# Altium PCB ebit_ad.PcbDoc (part 2 of 6)
Units mil, origin at the board's own origin, x right, y up, seen from the top; angles counter-clockwise.
Board outline 3958.82 x 3829.88 mil, 4 copper layers (Top Layer, MidLayer1, MidLayer2, Bottom Layer); 565 components, 392 nets, 1912 pads, 1242 vias.
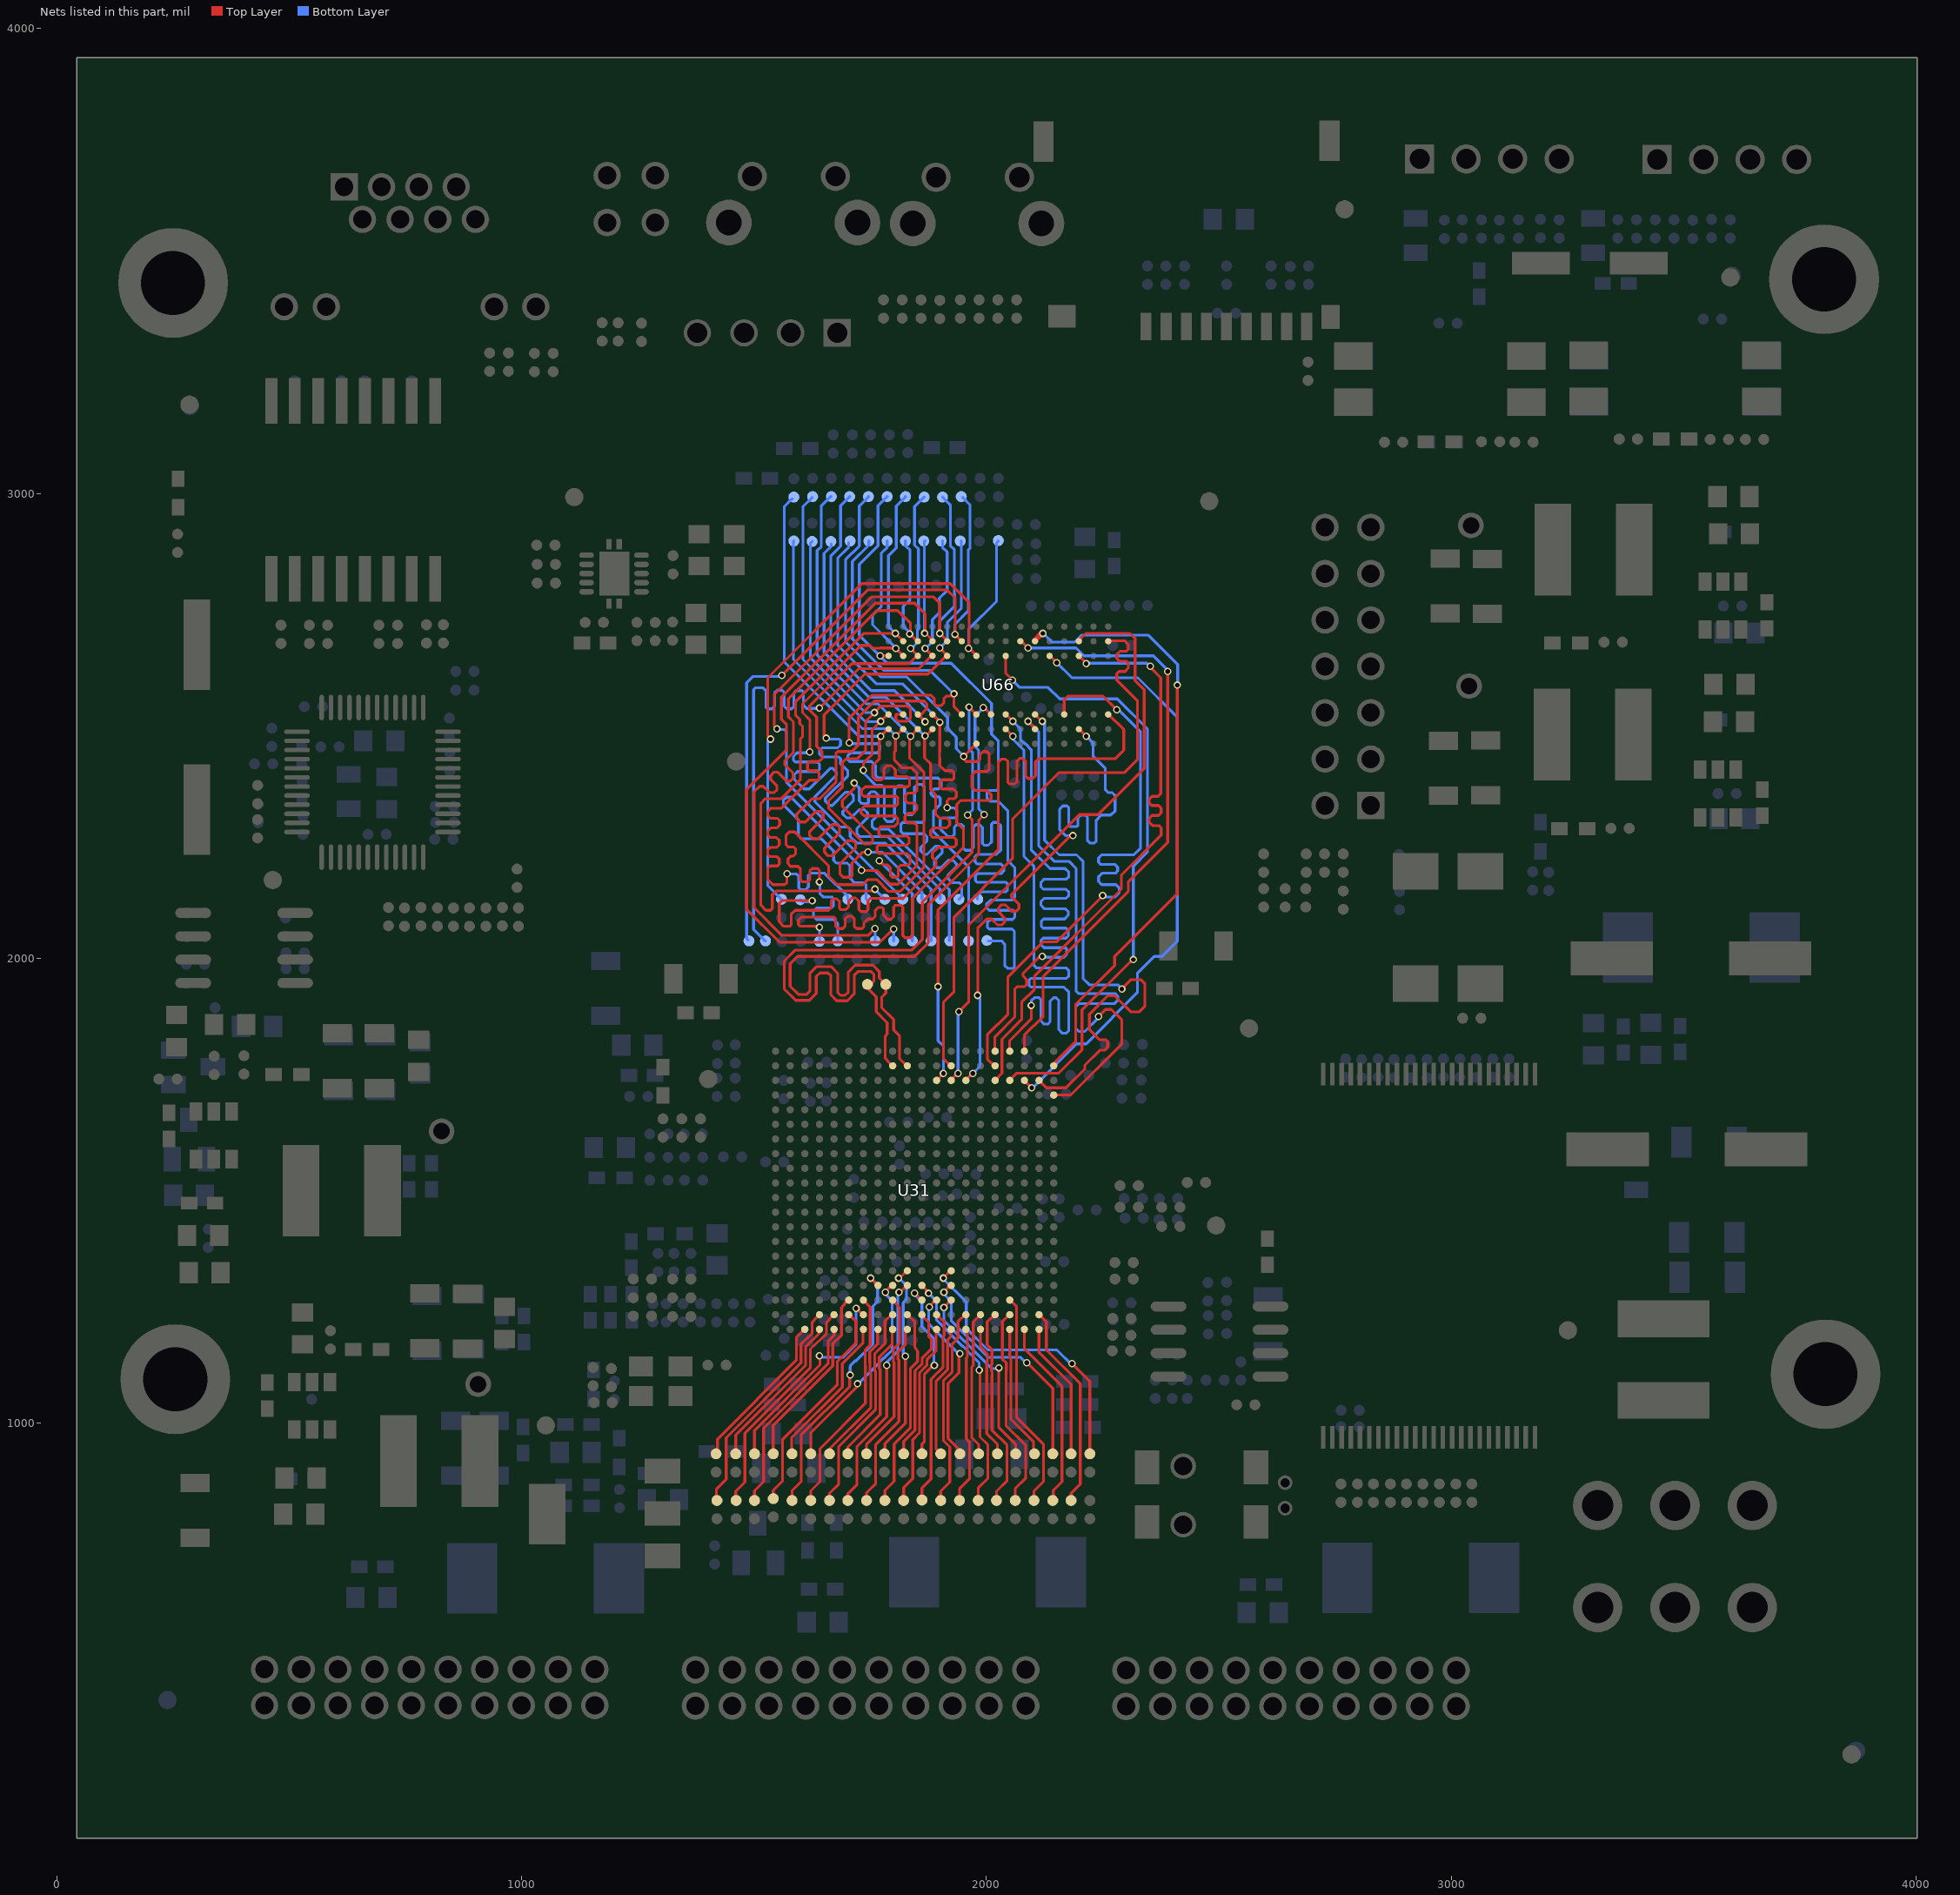
[diagram p4: the nets of this part, all layers, seen from the top]

## Via types
v1: diameter 16, hole 10, Top Layer to Bottom Layer, 1242 vias

## Nets (pads, with @x,y where several pads share a name; then routed paths per layer and width w, separated by ;. In a path a pad name is that pad's centre, name@x,y a point inside that pad or via, vN(x,y) a via of type N, cw(c..) or ccw(c..) an arc to the next point about the centre after c; other vN are vias at no path point) (continued)
DATA1-6_0: R2483.2 U31.H16 | length 618.1
  Top Layer w6: v1(1907.48,1312.01) 1907.48,1312.89 U31.H16@1923.13,1328.53 ; v1(2184.06,1127.95) 2222.44,1089.57 R2483.2@2222.44,934.05
  Bottom Layer w6: v1@1908.46,1309.05 1956.69,1260.83 1956.69,1203.74 2002.95,1157.48 2151.58,1157.48 v1@2184.06,1125
DATA1-7_0: R2478.2 U31.B19 | length 445.5
  Top Layer w6: U31.B19@2113.03,1234.2 2128.94,1218.3 2128.94,1157.48 2201.77,1084.65 2201.77,869.09 2182.09,849.41 R2478.2@2182.09,833.66
DATA1-8_0: R2482.2 U31.B20 | length 297.3
  Top Layer w6: U31.B20@2113.03,1202.76 2113.03,1152.71 2182.09,1083.66 R2482.2@2182.09,934.05
DATA1-9_0: R2477.2 U31.C20 | length 410.4
  Top Layer w6: U31.C20@2081.38,1202.76 2081.38,1160.74 2162.4,1079.72 2162.4,874.02 2143.7,855.31 R2477.2@2143.7,833.66
DATA1-11_0: R2476.2 U31.H17 | length 511
  Top Layer w6: v1(1908.46,1281.5) 1908.46,1282.43 U31.H17@1923.13,1297.09 ; v1(2086.61,1129.92) 2087.6,1129.92 2142.72,1074.8 R2476.2@2142.72,934.05
  Bottom Layer w6: v1(1908.46,1281.5) 1908.46,1277.56 1924.21,1261.81 1924.21,1220.47 2002.95,1141.73 2072.83,1141.73 v1@2087.6,1126.97
DATA1-13_0: R2473A.2 U31.D20 | length 290.3
  Top Layer w6: U31.D20@2051.18,1201.77 2050.2,1200.79 2050.2,1140.75 2052.58,1138.37 2052.58,1108.32 2052.32,1108.07 2052.32,1008.7 2101.38,959.65 2101.38,936.02 R2473A.2@2103.35,934.05
DATA1-14_0: R1488.2 U31.D18 | length 470.9
  Top Layer w6: U31.D18@2049.73,1265.65 2064.96,1250.42 2064.96,1011.81 2123.03,953.74 2123.03,875 2102.36,854.33 R1488.2@2102.36,833.66
DATA1-15_0: R2474.2 U31.H18 | length 410.6
  Top Layer w6: v1(1908.46,1249.02) 1923.13,1263.68 U31.H18@1923.13,1265.65 ; v1(2026.58,1119.09) 2026.58,990.16 2062.99,953.74 R2474.2@2062.99,934.05
  Bottom Layer w6: v1(1908.46,1249.02) 1908.46,1220.47 1953.27,1175.66 1953.78,1175.66 1969.01,1160.43 1969.01,1159.93 2011.81,1117.13 v1@2024.61,1117.13
DATA1-16_0: R1487.2 U31.D19 | length 437.4
  Top Layer w6: U31.D19@2049.73,1234.2 2034.45,1218.92 2034.45,1137.8 2042.58,1129.67 2042.58,1112.47 2042.32,1112.21 2042.32,994.09 2084.65,951.77 2084.65,941.96 2084.54,941.85 2084.54,926.26 2084.65,926.15 2084.65,902.59 2084.54,902.48 2084.54,886.89 2084.65,886.78 2084.65,881.89 2062.01,859.25 R1487.2@2062.01,833.66
DATA1-17_0: R2473.2 U31.F20 | length 283
  Top Layer w6: U31.F20@1987.2,1200.79 1987.2,1163.39 2001.97,1148.62 2001.97,1131.26 2000.58,1129.86 2000.58,977.77 2023.62,954.72 R2473.2@2023.62,934.05
DATA1-18_0: R2480.2 U31.E19 | length 435.9
  Top Layer w6: U31.E19@2018.08,1234.2 2001.72,1217.84 2001.72,1168.56 2011.97,1158.31 2011.97,1127.12 2010.58,1125.72 2010.58,1112.47 2012.22,1110.82 2012.22,1103.4 2011.97,1103.15 2011.97,985.08 2044.29,952.76 2044.29,941.96 2044.18,941.85 2044.18,926.26 2044.29,926.15 2044.29,902.59 2044.18,902.48 2044.18,886.89 2044.29,886.78 2044.29,875.98 2021.65,853.35 R2480.2@2021.65,833.66
DATA1-19_0: R2472.2 U31.F19 | length 311.8
  Top Layer w6: R2472.2@1983.27,934.05 1983.27,954.1 1968.35,969.02 1968.35,1120.85 1971.46,1123.96 1971.46,1217.52 U31.F19@1986.22,1232.28
DATA1-20_0: R2481.2 U31.K17 | length 537.5
  Top Layer w6: U31.K17@1859.82,1297.09 1875.98,1280.93 1875.98,1280.51 1875,1279.53 1875,1278.21 1875.65,1278.21 v1(1875.65,1279.34) ; R2481.2@1982.28,833.66 1982.28,860.24 2002.95,880.91 2002.95,953.74 1986.22,970.47 1986.22,1114.17 1986.17,1114.23 v1(1984.35,1114.23)
  Bottom Layer w6: v1@1875.98,1278.54 1892.72,1261.81 1892.72,1221.46 1948.51,1165.66 1949.64,1165.66 1959.01,1156.29 1959.01,1155.16 1984.25,1129.92 v1@1984.25,1112.2
DATA2-5_0: R2484.2 U31.G20 | length 383.6
  Top Layer w6: R2484.2@1941.93,833.66 1941.93,858.27 1963.58,879.92 1963.58,959.65 1956.69,966.54 1956.69,1140.72 1959.01,1143.03 1959.01,1198.53 U31.G20@1954.78,1202.76
DATA2-6_0: R2493.2 U31.J18 | length 389.6
  Top Layer w6: v1@1876.97,1248.03 1876.97,1251.14 U31.J18@1891.47,1265.65 ; R2493.2@1942.91,934.05 1942.91,941.93 1917.48,967.36 1917.48,1084.8 1940.95,1108.27 1940.95,1149.61 1941,1149.66 v1(1943.01,1149.66)
  Bottom Layer w6: v1@1877.95,1248.03 1875.98,1246.06 1875.98,1213.58 1940.95,1148.62 v1@1940.95,1147.64
  other v1: 1876.97,1250
DATA2-7_0: R2485.2 U31.G19 | length 432.8
  Top Layer w6: R2485.2@1901.58,833.66 1901.58,853.35 1921.26,873.03 1921.26,948.82 1907.48,962.6 1907.48,1091.54 1926.5,1110.55 1926.5,1128.36 1926.34,1128.52 1926.34,1170.43 1938.98,1183.07 1938.98,1218.5 U31.G19@1953.74,1233.27
DATA2-8_0: R2492.2 U31.H20 | length 285
  Top Layer w6: R2492.2@1901.58,934.05 1891.73,943.9 1891.73,1090.55 1916.5,1115.31 1916.5,1124.22 1916.34,1124.38 1916.34,1179.13 1923.23,1186.02 U31.H20@1923.23,1201.77
DATA2-9_0: R2486.2 U31.J19 | length 426
  Top Layer w6: R2486.2@1861.22,834.65 1861.22,860.24 1880.91,879.92 1880.91,1094.49 1894.49,1108.07 ; U31.J19@1891.73,1233.27 1909,1219 1909,1190 1906.34,1183.28 1906.34,1119.89 1894.51,1108.07
DATA2-11_0: R2487A.2 U31.K18 | length 393.4
  Top Layer w6: v1(1845.47,1279.53) 1845.94,1279.53 U31.K18@1859.82,1265.65 ; R2487A.2@1861.22,934.05 1861.22,954.72 1866.14,959.65 1866.14,1104.33 1885.88,1124.07 v1(1887.89,1124.07)
  Bottom Layer w6: v1(1845.47,1279.53) 1845.47,1276.57 1861.22,1260.83 1861.22,1207.68 1886.81,1182.09 1886.81,1126.97 v1@1885.83,1125.98
DATA2-13_0: R2488.2 U31.K19 | length 331.9
  Top Layer w6: R2488.2@1821.85,934.05 1821.85,960.63 1846.14,984.92 1846.14,1112.61 1861.79,1128.26 1861.79,1140.33 1881.73,1160.28 1881.73,1180.28 1875.98,1186.02 1875.98,1216.54 U31.K19@1860.24,1232.28
DATA2-14_0: R2506.2 U31.J20 | length 397.2
  Top Layer w6: R2506.2@1821.85,833.66 1821.85,861.22 1841.54,880.91 1841.54,942.39 1841.54,964.57 1856.14,979.17 1856.14,1108.47 1871.79,1124.12 1871.79,1136.19 1891.89,1156.29 1891.89,1201.61 U31.J20@1891.73,1201.77
DATA2-15_0: R2489.2 U31.L16 | length 430.9
  Top Layer w6: R2489.2@1781.5,934.05 1781.5,955.71 1825.79,1000 1825.79,1141.73 v1@1826.77,1142.72 ; v1(1811.02,1312.01) 1812.99,1312.01 U31.L16@1829.16,1328.17 ; U31.L16@1828.17,1328.17 U31.L16@1828.17,1328.53
  Bottom Layer w6: v1@1812.99,1311.02 1827.76,1296.26 1827.76,1265.75 1820.87,1258.86 1820.87,1148.62 v1(1825.79,1143.7)
DATA2-16_0: R2505.2 U31.L19 | length 441.4
  Top Layer w6: R2505.2@1781.5,833.66 1781.5,855.31 1801.18,875 1801.18,954.72 1836.14,989.68 1836.14,1116.76 1851.79,1132.4 1851.79,1154.47 1846,1163 1846,1218 U31.L19@1827,1236
DATA2-17_0: R2490.2 U31.M18 | length 369.1
  Top Layer w6: R2490.2@1742.13,934.05 1742.13,954.72 1801.43,1014.03 1801.43,1130.64 1799.79,1132.29 1799.79,1158.68 1812.99,1171.88 1812.99,1249.17 U31.M18@1796.52,1265.65
DATA2-18_0: R2507.2 U31.L20 | length 407.6
  Top Layer w6: R2507.2@1742.13,833.66 1742.13,850.39 1748.03,856.3 1748.22,856.3 1761.81,869.89 1761.81,886.78 1761.7,886.89 1761.7,902.48 1761.81,902.59 1761.81,926.15 1761.7,926.26 1761.7,953.63 1811.43,1003.36 1811.43,1135.43 1809.79,1137.07 1809.79,1153.29 1825.79,1169.29 1825.79,1200.79 U31.L20@1828.74,1203.74
DATA2-19_0: R2491.2 U31.M20 | length 308.9
  Top Layer w6: R2491.2@1701.77,934.05 1701.77,948.82 1771.39,1018.44 1771.39,1115.43 1769.43,1117.39 1769.43,1121.12 1769.43,1142.46 1797.24,1170.28 U31.M20@1797.24,1201.77
DATA2-20_0: R2504.2 U31.L17 | length 514.4
  Top Layer w6: R2504.2@1701.77,833.66 1701.77,848.42 1721.46,868.11 1721.46,949.8 1785.43,1013.78 v1(1785.43,1124.02) ; v1@1812.99,1280.51 1828.17,1295.69 U31.L17@1828.17,1297.09
  Bottom Layer w6: v1(1785.43,1124.02) 1785.43,1130.91 1809.06,1154.53 1809.06,1276.57 v1@1812.01,1279.53
  other v1: 1812.01,1281.5
DATA3-5_0: R2496.2 U31.M19 | length 456.3
  Top Layer w6: R2496.2@1662.4,833.66 1662.4,849.41 1682.09,869.09 1682.09,949.8 1761.39,1029.11 1761.39,1111.29 1759.43,1113.25 1759.43,1149.2 1781.5,1171.26 1781.5,1219.49 U31.M19@1795.28,1233.27
DATA3-6_0: R2510.2 U31.N20 | length 311.5
  Top Layer w6: R2510.2@1662.4,934.05 1662.4,944.88 1751.39,1033.87 1751.39,1107.14 1749.43,1109.1 1749.43,1128.87 1749.02,1129.29 1749.02,1153.54 1765.75,1170.28 U31.N20@1765.75,1200.79
DATA3-7_0: R2497.2 U31.P18 | length 490.6
  Top Layer w6: R2497.2@1622.05,833.66 1622.05,854.33 1641.73,874.02 1641.73,944.88 1739.43,1042.58 1739.43,1124.73 1739.02,1125.15 1739.02,1157.69 1750,1168.67 1750,1196.59 1749.99,1208.92 1750,1228.03 1749.99,1240.36 1750,1250 U31.P18@1735.24,1264.76
DATA3-8_0: R2511.2 U31.M17 | length 444.3
  Top Layer w6: R2511.2@1622.05,934.05 1622.05,979.33 1722.44,1079.72 v1(1722.44,1084.65) ; v1@1781.5,1281.5 1781.5,1282.07 U31.M17@1796.52,1297.09
  Bottom Layer w6: v1(1722.44,1084.65) 1724.41,1084.65 1769.43,1129.67 1769.43,1130.64 1778.81,1140.02 1779.78,1140.02 1797.24,1157.48 1797.24,1262.8 v1@1783.46,1276.57
  other v1: 1782.48,1281.5
DATA3-9_0: R2498.2 U31.N17 | length 585.8
  Top Layer w6: R2498.2@1581.69,833.66 1581.69,854.33 1601.38,874.02 1601.38,974.41 1705.71,1078.74 1705.71,1108.27 v1@1706.69,1109.25 ; v1(1750.98,1312.01) 1750.98,1310.97 U31.N17@1764.87,1297.09
  Bottom Layer w6: v1@1706.69,1106.3 1706.69,1121.06 1707.43,1121.8 1707.43,1124.35 1716.81,1133.72 1719.35,1133.72 1755.91,1170.28 1755.91,1251.97 1765.75,1261.81 1765.75,1297.24 v1(1750.98,1312.01)
  other v1: 1706.69,1103.35
DATA3-11_0: R2499.2 U31.P20 | length 333.1
  Top Layer w6: R2499.2@1582.68,934.05 1580.71,936.02 1580.71,968.5 1689.96,1077.76 1689.96,1127.95 1734.25,1172.24 U31.P20@1734.25,1202.76
DATA3-13_0: R2500.2 U31.R18 | length 395.3
  Top Layer w6: R2500.2@1541.34,934.05 1541.34,995.08 1669.45,1123.19 1669.45,1171.42 1688,1189 1688,1248 U31.R18@1700.79,1263.78
DATA3-14_0: R1492.2 U31.R19 | length 476.4
  Top Layer w6: R1492.2@1541.34,837.6 1541.34,855.31 1561.02,875 1561.02,964.57 1679.45,1082.99 1679.45,1133.19 1719,1172 1719,1220 U31.R19@1703.74,1233.27
DATA3-15_0: R2501.2 U31.P19 | length 451.5
  Top Layer w6: R2501.2@1501.97,934.05 1500.98,935.04 1500.98,984.25 1641.73,1125 1641.73,1143.7 v1(1640.75,1144.68) ; v1@1720.47,1247.05 1720.47,1246.95 U31.P19@1733.22,1234.2
  Bottom Layer w6: v1(1640.75,1144.68) 1643.7,1141.73 1691.93,1141.73 1719.49,1169.29 1719.49,1240.16 v1@1718.5,1241.14
  other v1: 1719.49,1247.05
DATA3-16_0: R1491.2 U31.T20 | length 440
  Top Layer w6: R1491.2@1500.98,833.66 1500.98,854.33 1520.67,874.02 1520.67,989.17 1659.45,1127.95 1659.45,1176.18 1672.24,1188.98 U31.T20@1672.24,1202.76
DATA3-17_0: R2502.2 U31.U20 | length 344.3
  Top Layer w6: R2502.2@1460.63,934.05 1460.63,974.41 1611.06,1124.84 1611.06,1164.21 1640.75,1193.9 U31.U20@1640.75,1203.74
DATA3-18_0: R2509.2 U31.T19 | length 485.4
  Top Layer w6: R2509.2@1460.63,835.63 1460.63,853.35 1480.32,873.03 1480.32,978.35 1621.06,1119.09 1621.06,1159.45 1656,1193 1656,1217 1669.91,1231.92 U31.T19@1669.91,1234.2
DATA3-19_0: R2503.2 U31.V20 | length 342.4
  Top Layer w6: R2503.2@1421.26,934.05 1421.26,965.55 1591.06,1135.35 1591.06,1184.57 U31.V20@1606.3,1199.8
DATA3-20_0: R2508.2 U31.U19 | length 491.1
  Top Layer w6: R2508.2@1419.29,833.66 1419.29,858.27 1439.96,878.94 1439.96,968.5 1601.06,1129.61 1601.06,1169.96 1625,1193 1625,1217 1638.26,1231.77 U31.U19@1638.26,1234.2
DDR-A0_0: R2517.2 R2621.1 U66.N3 | length 1428.7
  Top Layer w6: v1(1640.75,2538.39) 1725.39,2623.03 1854.33,2623.03 1883.86,2652.56 1881.89,2652.56 v1(1868.11,2666.34)
  Bottom Layer w6: R2517.2@1524.61,2037.4 1523.62,2037.4 1499.02,2062.01 1499.02,2577.76 1502.95,2581.69 1519.69,2581.69 1525.59,2575.79 1525.59,2540.35 1529.53,2536.42 1538.39,2536.42 1544.29,2542.32 1544.29,2570.87 1550.2,2576.77 1560.04,2576.77 1564.96,2571.85 1564.96,2542.32 1570.87,2536.42 1580.71,2536.42 1585.63,2541.34 1585.63,2570.87 1590.55,2575.79 1603.35,2575.79 1606.3,2572.83 1606.3,2544.29 1613.19,2537.4 v1@1638.78,2537.4 ; v1@1872.05,2669.29 1883.86,2681.1 1883.86,2691.94 1883.61,2692.19 1883.61,2728.09 1898.87,2743.36 1898.87,2762.53 1898.62,2762.78 1898.62,2774.61 1915.35,2791.34 1915.35,2874.02 1905.51,2883.86 R2621.1@1905.51,2897.64
DDR-A1_0: R2518.2 R2622.1 U66.P7 | length 1850.5
  Top Layer w6: v1(1745.08,2228.35) 1734.25,2228.35 1710.63,2204.72 1710.63,2177.17 1707.68,2174.21 1691.93,2174.21 1685.04,2181.1 1685.04,2203.74 1718.5,2237.2 1718.5,2247.05 1712.6,2252.95 1700.79,2252.95 1668.31,2220.47 1659.45,2220.47 1651.58,2228.35 1651.58,2237.2 1684.06,2269.68 1684.06,2281.5 1678.15,2287.4 1668.31,2287.4 1637.8,2256.89 1626.97,2256.89 1619.09,2264.76 1619.09,2271.65 1648.62,2301.18 1648.62,2311.02 1643.7,2315.94 1632.87,2315.94 1610.24,2293.31 1598.43,2293.31 1591.54,2300.2 1591.54,2310.04 1625,2343.5 1641.73,2343.5 1676.18,2377.95 1676.18,2440.94 1680.12,2444.88 1710.63,2444.88 1724.41,2458.66 1724.41,2518.7 1758.86,2553.15 1866.14,2553.15 1872.05,2547.24 1872.05,2537.4 1859.25,2524.61 1852.36,2524.61 v1(1868.11,2508.86)
  Bottom Layer w6: R2622.1@1705.71,2993.11 1686.02,2973.42 1686.02,2886.81 1665.35,2866.14 1665.35,2662.4 1751.97,2575.79 1802.17,2575.79 1868.11,2509.84 v1(1868.11,2508.86) ; v1(1745.08,2228.35) 1775.59,2228.35 1861.22,2142.72 R2518.2@1861.22,2127.95
DDR-A2_0: R2519.2 R2623.1 U66.P3 | length 1537.2
  Top Layer w6: 1567.91,2160.43 1565.95,2158.46 ; v1@1570.87,2183.07 1570.87,2163.39 1565.95,2158.46 ; v1(1836.61,2666.34) 1850.39,2652.56 1852.36,2652.56 1833.66,2633.86 1710.63,2633.86 1619.09,2542.32 1619.09,2534.45 1634.84,2518.7 1634.84,2455.71 1646.65,2443.9 1646.65,2430.12 1639.76,2423.23 1619.09,2423.23 1615.16,2419.29 1615.16,2406.5 1618.11,2403.54 1634.84,2403.54 1639.76,2398.62 1639.76,2385.83 1636.81,2382.87 1619.09,2382.87 1559.06,2322.83 1536.42,2322.83 1529.53,2315.94 1529.53,2307.09 1535.43,2301.18 1550.2,2301.18 1555.12,2296.26 1555.12,2286.42 1549.21,2280.51 1536.42,2280.51 1529.53,2273.62 1529.53,2264.76 1534.45,2259.84 1548.23,2259.84 1554.13,2253.94 1554.13,2244.09 1548.23,2238.19 1534.45,2238.19 1529.53,2233.27 1529.53,2223.42 1534.45,2218.5 1549.21,2218.5 1554.13,2213.58 1554.13,2202.76 1550.2,2198.82 1534.45,2198.82 1529.53,2193.9 1529.53,2169.29 1540.35,2158.46 1565.95,2158.46
  Bottom Layer w6: v1@1575.79,2181.1 1591.54,2181.1 1596.46,2176.18 1596.46,2151.57 1600.39,2147.64 1611.22,2147.64 1617.13,2153.54 1617.13,2178.15 1622.05,2183.07 1651.57,2183.07 1701.77,2132.87 R2519.2@1701.77,2126.97 ; v1@1837.6,2665.35 1851.38,2679.13 1851.38,2692.16 1851.22,2692.32 1851.22,2702.76 1851.22,2705.58 1853.6,2707.96 1853.6,2880.65 1845.47,2888.78 1845.47,2971.46 R2623.1@1866.14,2992.13
  other v1: 1570.87,2182.09
DDR-A3_0: R2520.2 R2624.1 U66.N2 | length 1547.7
  Top Layer w6: v1(1800.2,2062.99) 1799.21,2062.99 1770.67,2034.45 1555.12,2034.45 1484.25,2105.31 1484.25,2363.19 1569.88,2448.82 1569.88,2502.95 1559.06,2513.78 1559.06,2562.01 1760.83,2763.78 1845.47,2763.78 1868.11,2741.14 v1@1868.11,2698.82 ; v1(1867.22,2698.95) 1867.98,2698.95 v1@1868.11,2698.82 ; U66.N2@1883.86,2684.05 1869.1,2698.82 v1@1868.11,2698.82
  Bottom Layer w6: R2520.2@1800.2,2037.4 v1(1800.2,2062.99) ; v1@1868.11,2699.84 v1(1867.22,2698.95) 1866.14,2700.03 1866.14,2895.67 R2624.1@1868.11,2897.64
DDR-A4_0: R2521.2 R2625.1 U66.P8 | length 1798.9
  Top Layer w6: v1(1640.75,2164.37) 1640.75,2188.98 1636.81,2192.91 1625,2192.91 1620.08,2187.99 1620.08,2168.31 1616.14,2164.37 1604.33,2164.37 1599.41,2169.29 1599.41,2192.91 1594.49,2197.83 1578.74,2197.83 1572.83,2203.74 1572.83,2213.58 1578.74,2219.49 1583.66,2219.49 1589.57,2225.39 1589.57,2235.24 1585.63,2239.17 1573.82,2239.17 1568.9,2244.09 1568.9,2264.76 1575.79,2271.65 1587.6,2271.65 1660.43,2198.82 1660.43,2177.17 1679.13,2158.46 1734.25,2158.46 1745.08,2169.29 1763.78,2169.29 1789.37,2143.7 1813.98,2143.7 1865.16,2194.88 1865.16,2400.59 1844.62,2421.13 1843.86,2421.13 1834.48,2430.5 1834.48,2443.75 1834.76,2444.03 1834.76,2475.5 v1(1836.61,2477.36) 1851.38,2492.13 U66.P8@1852.36,2492.13
  Bottom Layer w6: v1@1641.73,2162.4 1641.73,2138.78 1648.62,2131.89 1667.32,2131.89 1670.28,2128.94 1670.28,2112.2 1666.34,2108.27 1634.84,2108.27 1627.95,2101.38 1627.95,2090.55 1634.84,2083.66 1671.26,2083.66 1680.12,2074.8 R2521.2@1680.12,2037.4 ; R2625.1@1666.34,2993.11 1664.37,2993.11 1644.69,2973.42 1644.69,2885.83 1635.83,2876.97 1635.83,2652.56 1741.14,2547.24 1766.73,2547.24 v1@1834.65,2479.33
DDR-A5_0: R2522.2 R2626.1 U66.P2 | length 1530.5
  Top Layer w6: v1(1759.84,2063.98) 1745.08,2049.21 1560.04,2049.21 1500,2109.25 1500,2358.27 1511.81,2370.08 1519.69,2370.08 1533.46,2356.3 1543.31,2356.3 1549.21,2362.2 1549.21,2371.06 1535.43,2384.84 1535.43,2392.72 1543.31,2400.59 1550.2,2400.59 1569.88,2380.91 1577.76,2380.91 1583.66,2386.81 1583.66,2398.62 1565.95,2416.34 1565.95,2424.21 1584.65,2442.91 1584.65,2508.86 1573.82,2519.68 1573.82,2558.07 1763.78,2748.03 1809.06,2748.03 1836.61,2720.47 v1@1836.61,2697.83 ; v1@1835.63,2697.83 1849.41,2684.05 U66.P2@1852.36,2684.05
  Bottom Layer w6: v1(1759.84,2063.98) 1760.83,2062.99 R2522.2@1760.83,2037.4 ; R2626.1@1825.79,2897.64 1825.79,2887.79 1835.63,2877.95 1835.63,2771.65 1820.87,2756.89 1820.87,2736.21 1821.12,2735.96 1821.12,2722.7 1820.87,2722.45 1820.87,2714.57 v1@1835.63,2699.8
  other v1: 1834.65,2697.83
DDR-A6_0: R2523.2 R2627.1 U66.R8 | length 1678.5
  Top Layer w6: v1(1731.3,2188.98) 1763.78,2188.98 1793.31,2159.45 1810.04,2159.45 1850.39,2199.8 1850.39,2285.43 1844.49,2291.34 1830.71,2291.34 1824.8,2297.24 1824.8,2305.12 1831.69,2312.01 1842.52,2312.01 1850.39,2319.88 1850.39,2328.74 1845.47,2333.66 1831.69,2333.66 1825.79,2339.57 1825.79,2350.39 1830.71,2355.31 1845.47,2355.31 1850.39,2360.24 1850.39,2398.62 1839.57,2409.45 1818.9,2409.45 1811.02,2417.32 1802,2426.34 1802,2443.75 1804.13,2445.89 1804.13,2477.36 v1(1805.12,2478.35) 1818.9,2492.13 U66.R8@1820.87,2492.13
  Bottom Layer w6: R2627.1@1585.63,2897.64 1584.65,2896.65 1584.65,2642.72 1733.52,2493.84 1779.27,2493.84 1779.52,2494.09 1789.37,2494.09 v1(1805.12,2478.35) ; v1@1733.27,2186.02 1733.27,2192.91 1579.72,2346.46 1569.88,2346.46 1562.99,2339.57 1562.99,2330.71 1595.47,2298.23 1595.47,2263.78 1602.36,2256.89 1644.69,2256.89 1671.26,2230.31 1671.26,2210.63 1677.17,2204.72 1700.79,2204.72 1706.69,2198.82 1706.69,2172.24 1716.54,2162.4 1736.22,2162.4 1741.14,2157.48 R2523.2@1741.14,2126.97
DDR-A7_0: R2524.2 R2628.1 U66.R2 | length 1426.1
  Top Layer w6: v1(1759.84,2148.62) 1755.91,2144.68 1547.24,2144.68 1539.37,2136.81 1539.37,2107.28 1535.43,2103.35 1525.59,2103.35 1514.76,2114.17 1514.76,2333.66 1524.61,2343.5 1559.06,2343.5 1599.41,2383.86 1599.41,2471.46 1604.33,2476.38 1604.33,2499.02 1598.43,2504.92 1598.43,2513.78 1589.57,2522.64 1589.57,2552.16 1736.47,2699.07 1782.32,2699.07 1782.57,2698.82 v1(1804.13,2698.82) 1818.9,2684.05 U66.R2@1820.87,2684.05
  Bottom Layer w6: v1@1762.8,2145.67 R2524.2@1781.5,2126.97 ; v1@1803.15,2699.8 1789.12,2713.83 1789.12,2865.89 1806.1,2882.87 1806.1,2972.44 1825.79,2992.13 R2628.1@1825.79,2993.11
DDR-A8_0: R2525.2 R2629.1 U66.T8 | length 1904.2
  Top Layer w6: v1@1770.67,2208.66 1778.54,2200.79 1787.4,2200.79 1793.31,2194.88 1793.31,2178.15 1797.24,2174.21 1807.09,2174.21 1810.04,2177.16 1810.04,2194.88 1814.96,2199.8 1831.69,2199.8 1835.63,2203.74 1835.63,2219.49 1829.72,2225.39 1768.7,2225.39 1764.76,2229.33 1764.76,2240.16 1767.72,2243.11 1828.74,2243.11 1833.66,2248.03 1833.66,2258.86 1829.72,2262.79 1773.62,2262.79 1768.7,2267.72 1768.7,2278.54 1773.62,2283.46 1802.17,2283.46 1809.06,2290.35 1809.06,2301.18 1804.13,2306.1 1737.2,2306.1 1735.24,2308.07 1730.32,2312.99 1730.32,2319.88 1738.19,2327.76 1805.12,2327.76 1809.06,2331.69 1809.06,2345.47 1806.1,2348.42 1736.22,2348.42 1731.3,2353.35 1731.3,2361.22 1739.17,2369.09 1830.71,2369.09 1834.65,2373.03 1834.65,2385.83 1829.72,2390.75 1806.1,2390.75 1804.13,2392.72 1804.13,2405.51 1795.28,2414.37 1785.43,2414.37 1779.53,2408.46 1779.53,2388.78 1774.61,2383.86 1761.81,2383.86 1754.92,2390.75 1754.92,2414.37 1769.52,2428.97 1769.52,2472.28 1770.67,2473.42 1770.67,2475.39 v1(1772.64,2477.36) 1787.4,2492.13 U66.T8@1789.37,2492.13
  Bottom Layer w6: R2629.1@1582.68,2988.19 1581.69,2988.19 1564.96,2971.46 1564.96,2637.79 1725.39,2477.36 v1(1772.64,2477.36) ; v1@1771.26,2208.07 1840.55,2138.78 R2525.2@1840.55,2037.4
  other v1: 1769.69,2209.65
DDR-A9_0: R2526.2 R2630.1 U66.R3 | length 1488.5
  Top Layer w6: v1(1620.08,2443.9) 1620.08,2512.79 1604.33,2528.54 1604.33,2547.24 1730.32,2673.23 1749.02,2673.23 1755.17,2667.07 1771.39,2667.07 1771.64,2667.32 1804.13,2667.32 v1(1805.12,2666.34) 1818.9,2652.56 U66.R3@1820.87,2652.56
  Bottom Layer w6: v1@1619.09,2441.93 1592.52,2441.93 1584.65,2434.05 1584.65,2426.18 1588.58,2422.24 1635.83,2422.24 1640.75,2417.32 1640.75,2406.5 1635.83,2401.57 1593.5,2401.57 1586.61,2394.68 1586.61,2384.84 1607.28,2364.17 1619.09,2364.17 1663.39,2408.46 1669.29,2408.46 1677.17,2400.59 1677.17,2393.7 1630.91,2347.44 1630.91,2336.61 1685.04,2282.48 1701.77,2282.48 1706.69,2277.56 1706.69,2261.81 1720.47,2248.03 1781.5,2248.03 1880.91,2148.62 R2526.2@1880.91,2037.4 ; R2630.1@1786.42,2897.64 1786.42,2883.86 1773.62,2871.06 1773.62,2755.91 1754.92,2737.2 1754.92,2717.52 1802.17,2670.28 v1@1802.17,2666.34
DDR-A10_0: R2527.2 R2631.1 U66.L7 | length 1670
  Top Layer w6: v1(1704.72,2463.58) 1704.72,2516.73 1753.94,2565.94 1880.91,2565.94 1887.8,2559.05 1887.8,2548.23 1892.72,2543.31 1902.56,2543.31 1908.46,2549.21 1908.46,2559.05 1913.39,2563.98 1925.2,2563.98 v1(1930.12,2568.9) 1930.12,2541.34 U66.L7@1946.85,2524.61
  Bottom Layer w6: v1@1709.65,2462.6 1710.63,2461.61 1766.73,2461.61 1770.67,2457.68 1770.67,2447.83 1764.76,2441.93 1707.68,2441.93 1701.77,2436.02 1701.77,2427.17 1705.71,2423.23 1752.95,2423.23 1761.81,2414.37 1761.81,2392.72 1766.73,2387.79 1895.67,2387.79 1902.56,2380.91 1902.56,2370.08 1896.65,2364.17 1887.8,2364.17 1880.91,2357.28 1880.91,2353.35 1886.81,2347.44 1897.64,2347.44 1900.59,2344.49 1900.59,2330.71 1885.83,2315.94 1885.83,2272.64 1961.61,2196.85 R2527.2@1961.61,2037.4 ; R2631.1@1747.05,2897.64 1747.05,2888.78 1711.61,2853.35 1711.61,2687.01 1779.53,2619.09 1878.94,2619.09 1927.17,2570.87 v1@1927.17,2569.88
DDR-A11_0: R2528.2 R2632.1 U66.R7 | length 1669.1
  Top Layer w6: v1(1715.55,2376.97) 1715.55,2365.16 1689.96,2339.57 1689.96,2326.77 1754.92,2261.81 1754.92,2250.98 1750,2246.06 1737.2,2246.06 1660.43,2322.83 1660.43,2338.58 1689.96,2368.11 1689.96,2421.26 1697.83,2429.13 1721.46,2429.13 1740.16,2447.83 1740.16,2509.84 v1(1758.86,2528.54) 1772.64,2542.32 1830.71,2542.32 1836.61,2536.42 1836.61,2516.73 1829.72,2509.84 1810.04,2509.84 1805.12,2514.76 1805.12,2523.62 1806.1,2524.61 U66.R7@1820.87,2524.61
  Bottom Layer w6: R2632.1@1625,2896.65 1621.06,2892.72 1621.06,2646.65 1739.17,2528.54 v1@1755.91,2528.54 ; v1(1715.55,2376.97) 1726.38,2366.14 1726.38,2338.58 1732.28,2332.68 1744.09,2332.68 1746.06,2334.65 1746.06,2352.36 1751.97,2358.27 1759.84,2358.27 1766.73,2351.38 1766.73,2308.07 1753.94,2295.28 1753.94,2283.46 1759.84,2277.56 1790.35,2277.56 1920.28,2147.64 R2528.2@1920.28,2038.39
DDR-A12_0: R2529.2 R2633.1 U66.N7 | length 1689.1
  Top Layer w6: U66.N7@1883.86,2524.61 1899.61,2508.86 1899.61,2444.87 1899.35,2444.62 1899.35,2431.36 1899.61,2431.11 1899.61,2414.37 1910.43,2403.54 1926.18,2403.54 1930.12,2399.61 1930.12,2386.81 1927.17,2383.86 1904.53,2383.86 1899.61,2378.94 1899.61,2369.09 1904.53,2364.17 1929.13,2364.17 1935.04,2358.27 1935.04,2347.44 1931.1,2343.5 1920.28,2343.5 1915.35,2338.58 v1(1915.35,2323.82)
  Bottom Layer w6: R2633.1@1703.74,2894.68 1703.74,2884.84 1680.12,2861.22 1680.12,2673.23 1762.8,2590.55 1818.9,2590.55 1899.61,2509.84 v1(1899.61,2507.87) ; v1@1918.31,2323.82 1930.12,2323.82 1936.02,2317.91 1936.02,2305.12 1933.07,2302.17 1904.53,2302.17 1900.59,2298.23 1900.59,2278.54 1917.32,2261.81 1926.18,2261.81 1931.1,2266.73 1931.1,2282.48 1936.02,2287.4 1946.85,2287.4 1950.79,2283.46 1950.79,2236.22 1954.72,2232.28 1965.55,2232.28 1971.46,2238.19 1971.46,2281.5 1977.36,2287.4 1985.24,2287.4 1991.14,2281.5 1991.14,2247.05 1995.08,2243.11 2003.94,2243.11 2010.83,2250 2010.83,2288.39 2014.76,2292.32 2023.62,2292.32 2030.51,2285.43 2030.51,2232.28 2021.65,2223.42 1980.32,2223.42 1975.39,2218.5 1975.39,2207.68 1980.32,2202.76 2031.5,2202.76 2037.4,2196.85 2037.4,2187.99 2031.5,2182.09 1980.32,2182.09 1976.38,2178.15 1976.38,2167.32 1980.32,2163.39 2042.32,2163.39 2045.28,2160.43 2045.28,2146.65 2041.34,2142.72 1988.19,2142.72 1980.32,2134.84 R2529.2@1980.32,2126.97
DDR-A13_0: R2530.2 R2634.1 U66.T3 | length 1639.8
  Top Layer w6: v1@1769.69,2650.59 1787.4,2650.59 U66.T3@1789.37,2652.56
  Bottom Layer w6: R2634.1@1786.42,2993.11 1766.73,2973.42 1766.73,2887.79 1726.38,2847.44 1726.38,2694.88 1786.42,2634.84 1924.21,2634.84 2010.83,2548.23 2010.83,2482.28 2025.59,2467.52 2025.59,2365.16 2021.65,2361.22 2003.94,2361.22 2000.98,2358.27 2000.98,2344.49 2007.87,2337.6 2025.59,2337.6 2046.26,2316.93 2046.26,2209.65 2061.02,2194.88 2061.02,2130.91 2055.12,2125 2008.86,2125 2000,2116.14 2000,2109.25 2005.91,2103.35 2057.09,2103.35 2061.02,2099.41 2061.02,2088.58 2056.1,2083.66 2008.86,2083.66 2001.97,2076.77 2001.97,2066.93 2005.91,2062.99 2055.12,2062.99 2060.04,2058.07 2060.04,1980.31 2058.07,1978.35 2045.28,1978.35 2039.37,1984.25 2039.37,2030.51 2032.48,2037.4 R2530.2@2003.94,2037.4
  other v1: 1771.65,2650.59
DDR-A14_0: R2531.2 R2635.1 U66.T7 | length 1634.4
  Top Layer w6: v1(1735.24,2404.53) 1735.24,2419.29 1753.94,2437.99 1753.94,2491.14 v1(1772.64,2509.84) 1787.4,2524.61 U66.T7@1789.37,2524.61
  Bottom Layer w6: R2635.1@1625,2991.14 1605.32,2971.46 1605.32,2642.72 1739.17,2508.86 1771.65,2508.86 v1(1772.64,2509.84) ; v1@1736.22,2402.56 1736.22,2397.64 1761.81,2372.05 1775.59,2372.05 1780.51,2367.13 1780.51,2300.2 1786.42,2294.29 1797.24,2294.29 1802.17,2299.21 1802.17,2363.19 1810.04,2371.06 1818.9,2371.06 1823.82,2366.14 1823.82,2312.99 1827.76,2309.05 1839.57,2309.05 1845.47,2314.96 1845.47,2368.11 1851.38,2374.02 1861.22,2374.02 1866.14,2369.09 1866.14,2296.26 1862.2,2292.32 1819.88,2292.32 1815.95,2288.39 1815.95,2272.64 1820.87,2267.72 1866.14,2267.72 1872.05,2261.81 1872.05,2251.97 1858.27,2238.19 1858.27,2231.3 1866.14,2223.42 1872.05,2223.42 1889.76,2241.14 1898.62,2241.14 1904.53,2235.24 1904.53,2226.38 1887.8,2209.65 1887.8,2199.8 1892.72,2194.88 1902.56,2194.88 1918.31,2210.63 1928.15,2210.63 1936.02,2202.76 1936.02,2197.83 1917.32,2179.13 1917.32,2171.26 1926.18,2162.4 1941.93,2162.4 1946.85,2157.48 1946.85,2132.87 R2531.2@1940.95,2126.97
DDR-BA0_0: R2514.2 R2636.1 U66.M2 | length 1418
  Top Layer w6: v1(1549.21,2493.11) 1543.31,2499.02 1543.31,2566.93 1753.94,2777.56 1885.83,2777.56 1899.61,2763.78 v1(1899.61,2698.82) 1914.37,2684.05 U66.M2@1915.36,2684.05
  Bottom Layer w6: v1@1547.24,2492.13 1564.96,2492.13 1569.88,2487.2 1569.88,2377.95 1819.88,2127.95 R2514.2@1819.88,2126.97 ; v1(1899.61,2698.82) 1899.61,2725.39 1931.35,2757.14 1931.35,2783.35 1931.1,2783.6 1931.1,2878.94 1922.24,2887.79 1922.24,2975.39 R2636.1@1905.51,2992.13
DDR-BA1_0: R2515.2 R2637.1 U66.N8 | length 1625.7
  Top Layer w6: v1(1625,2124.02) 1560.04,2124.02 1554.13,2118.11 1554.13,2078.74 1563.98,2068.9 1576.77,2068.9 1579.72,2071.85 1579.72,2094.49 1588.58,2103.35 1660.43,2103.35 1666.34,2109.25 1666.34,2124.02 1670.28,2127.95 1678.15,2127.95 1684.06,2122.05 1684.06,2107.28 1687.01,2104.33 1696.85,2104.33 1703.74,2111.22 1703.74,2123.03 1710.63,2129.92 1718.5,2129.92 1725.39,2123.03 1725.39,2105.31 1730.32,2100.39 1741.14,2100.39 1745.08,2104.33 1745.08,2124.02 1750,2128.94 1820.87,2128.94 1891.73,2199.8 1891.73,2208.66 1883.86,2216.54 1883.86,2226.38 1896.65,2239.17 1930.12,2239.17 1935.04,2244.09 1935.04,2254.92 1930.12,2259.84 1884.84,2259.84 1879.92,2264.76 1879.92,2274.61 1885.83,2280.51 1914.37,2280.51 1921.26,2287.4 1921.26,2295.28 1915.35,2301.18 1899.61,2301.18 1890.75,2310.04 1890.75,2352.36 1879.92,2363.19 1879.92,2418.31 1866.97,2431.26 1866.97,2446.97 1866.97,2477.2 v1(1868.11,2478.35) 1870.08,2478.35 U66.N8@1883.86,2492.13
  Bottom Layer w6: R2515.2@1599.41,2125.98 1603.35,2122.05 v1@1620.08,2122.05 ; R2637.1@1666.34,2891.73 1666.34,2886.81 1650.59,2871.06 1650.59,2658.46 1748.03,2561.02 1784.45,2561.02 1867.13,2478.35 v1(1868.11,2478.35)
DDR-BA2_0: R2516.2 R2638.1 U66.M3 | length 1403.3
  Top Layer w6: v1(1655.51,2473.42) 1650.59,2478.35 1650.59,2523.62 1738.19,2611.22 1874.02,2611.22 1915.36,2652.56 1914.37,2652.56 v1(1899.61,2667.32)
  Bottom Layer w6: v1@1659.45,2471.46 1683.07,2471.46 1686.02,2468.5 1686.02,2458.66 1680.12,2452.76 1646.65,2452.76 1640.75,2446.85 1640.75,2438.98 1646.65,2433.07 1682.09,2433.07 1686.02,2429.13 1686.02,2418.31 1701.77,2402.56 1701.77,2392.72 1653.54,2344.49 1653.54,2337.6 1662.4,2328.74 1668.31,2328.74 1696.85,2357.28 1706.69,2357.28 1713.58,2350.39 1713.58,2338.58 1690.95,2315.94 1690.95,2310.04 1698.82,2302.17 1708.66,2302.17 1726.38,2319.88 1737.2,2319.88 1744.09,2312.99 1744.09,2302.16 1721.46,2279.53 1721.46,2267.72 1727.36,2261.81 1787.4,2261.81 1900.59,2148.62 R2516.2@1900.59,2127.95 ; v1(1899.61,2667.32) 1916.09,2683.8 1916.09,2723.17 1945.87,2752.95 R2638.1@1945.87,2897.64
DDR-CAS_0: R2533.2 R2640.1 U66.K3 | length 1402.2
  Top Layer w6: v1(1535.43,2471.46) 1529.53,2477.36 1529.53,2603.35 1732.28,2806.1 1922.24,2806.1 1962.6,2765.75 1962.6,2667.32 1977.36,2652.56 U66.K3@1978.35,2652.56
  Bottom Layer w6: v1@1532.48,2469.49 1529.53,2466.54 1529.53,2156.5 R2533.2@1559.06,2126.97 ; v1(1961.61,2666.34) 1961.61,2707.68 2021.65,2767.72 2021.65,2893.7 R2640.1@2025.59,2897.64
DDR-CK#_0: R2542.1 U31.M2 U66.K7 | length 1532.1
  Top Layer w6: R2542.1@1744.09,1943.9 1750.98,1943.9 1757.87,1950.79 1757.87,1965.55 1751.97,1971.46 1723.43,1971.46 1715.55,1963.58 1715.55,1923.23 1700.79,1908.46 1678.15,1908.46 1665.35,1921.26 1665.35,1962.6 1659.45,1968.5 1641.73,1968.5 1633.86,1960.63 1633.86,1924.21 1619.09,1909.45 1589.57,1909.45 1564.96,1934.05 1564.96,1994.09 1588.58,2017.72 1839.57,2017.72 1862.2,2040.35 1862.2,2121.06 1969.49,2228.35 1969.49,2298.23 v1(1959.65,2308.07) ; R2542.1@1747.05,1939.96 1747.05,1933.07 1762.8,1917.32 1762.8,1884.84 1786.42,1861.22 1786.42,1837.6 1782,1831 1782,1786 U31.M2@1796.52,1768.75 ; v1@1961.61,2540.35 v1(1962.6,2540.35) U66.K7@1978.35,2524.61
  Bottom Layer w6: v1@1958.66,2308.07 1970.47,2319.88 1970.47,2441.93 1962.6,2449.8 v1(1962.6,2540.35)
DDR-CK_0: R2542.2 U31.L2 U66.J7 | length 1544.6
  Top Layer w6: R2542.2@1783.46,1941.93 1783.46,1925.2 1774.61,1916.34 1774.61,1893.7 1800.2,1868.11 1800.2,1845.47 1813.24,1832.42 1813.24,1815.22 1812.99,1814.97 1812.99,1783.93 U31.L2@1828.17,1768.75 ; R2542.2@1783.46,1943.9 1769.69,1957.68 1769.69,1971.46 1755.91,1985.24 1717.52,1985.24 1702.76,1970.47 1702.76,1927.17 1695.87,1920.28 1686.02,1920.28 1680.12,1926.18 1680.12,1967.52 1665.35,1982.28 1634.84,1982.28 1620.08,1967.52 1620.08,1929.13 1613.19,1922.24 1595.47,1922.24 1577.76,1939.96 1577.76,1988.19 1593.5,2003.94 1845.47,2003.94 1875,2033.46 1875,2115.16 1983.27,2223.42 1983.27,2297.24 v1(1995.08,2309.05) ; v1@1994.09,2541.34 1994.09,2540.35 U66.J7@2009.84,2524.61
  Bottom Layer w6: v1@1993.11,2538.39 1975.39,2520.67 1975.39,2455.71 1983.27,2447.83 1983.27,2320.87 v1(1995.08,2309.05)
  other v1: 1993.11,2539.37
DDR-CKE_0: R2536.2 R2644.1 U66.K9 | length 1935.1
  Top Layer w6: v1@1640.75,2068.9 1599.41,2068.9 1595.47,2072.83 1595.47,2081.69 1602.36,2088.58 1672.24,2088.58 1675.2,2085.63 1675.2,2069.88 1681.1,2063.98 1690.95,2063.98 1695.87,2068.9 1695.87,2084.65 1701.77,2090.55 1710.63,2090.55 1715.55,2085.63 1715.55,2068.9 1720.47,2063.98 1732.28,2063.98 1736.22,2067.91 1736.22,2075.79 1745.08,2084.65 1754.92,2084.65 1760.83,2090.55 1760.83,2103.35 1766.73,2109.25 1775.59,2109.25 1778.54,2106.3 1778.54,2092.52 1787.4,2083.66 1794.29,2083.66 1800.2,2089.57 1800.2,2110.24 1804.13,2114.17 1815.95,2114.17 1819.88,2110.24 1819.88,2049.21 1824.8,2044.29 1835.63,2044.29 1840.55,2049.21 1840.55,2128.94 1950.79,2239.17 1950.79,2277.56 1936.02,2292.32 1936.02,2330.71 1944.88,2339.57 2005.91,2339.57 2009.84,2343.5 2009.84,2352.36 2000.98,2361.22 1975.39,2361.22 1968.5,2368.11 1968.5,2393.7 1976.38,2401.57 2000.98,2401.57 2005.91,2406.5 2005.91,2439.96 2000.98,2444.88 1993.11,2444.88 1986.22,2437.99 1986.22,2428.15 1981.3,2423.23 1956.69,2423.23 1950.79,2429.13 v1(1950.79,2434.05) U66.K9@1978.35,2461.61
  Bottom Layer w6: R2536.2@1640.75,2036.42 v1@1640.75,2064.96 ; R2644.1@1746.06,2993.11 1746.06,2992.13 1726.38,2972.44 1726.38,2886.81 1696.85,2857.28 1696.85,2681.1 1772.64,2605.31 1828.74,2605.31 1916.34,2517.72 1916.34,2494.09 1935.04,2475.39 1935.04,2450.79 v1@1947.83,2437.99
  other v1: 1640.75,2066.93
DDR-CS_0: R2535.2 R2643.1 U66.L2 | length 1507.5
  Top Layer w6: v1(1560.04,2608.27) 1744.09,2792.32 1915.35,2792.32 1933.07,2774.61 1933.07,2719.45 1932.96,2719.34 1932.96,2707.83 1933.07,2707.72 1933.07,2701.77 1930.12,2698.82 v1(1932.09,2696.85) 1944.88,2684.05 U66.L2@1946.85,2684.05
  Bottom Layer w6: R2535.2@1487.2,2039.37 1484.25,2042.32 1484.25,2592.52 1498.03,2606.3 1558.07,2606.3 v1(1560.04,2608.27) ; v1(1932.09,2696.85) 1932.09,2718.5 1960.63,2747.05 1960.63,2877.95 1964.57,2881.89 1964.57,2975.39 R2643.1@1948.82,2991.14
DDR-DQ0_0: U31.C3 U66.E3 | length 1299.4
  Top Layer w6: U31.C3@2081.38,1737.31 2097.23,1721.46 v1(2097.44,1721.46) ; U66.E3@2135.83,2652.56 2135.83,2651.57 v1(2151.58,2635.83)
  Bottom Layer w6: v1@2100.39,1723.42 2101.38,1723.42 2193.9,1815.94 2214.57,1815.94 2324.8,1926.18 2324.8,1967.52 2361.22,2003.94 2377.95,2003.94 2410.43,2036.42 2410.43,2518.7 2325.79,2603.35 2184.06,2603.35 v1(2151.58,2635.83)
DDR-DQ1_0: U31.B3 U66.F7 | length 1281.7
  Top Layer w6: U66.F7@2104.33,2524.61 2119.09,2509.84 v1(2120.08,2509.84) ; U31.B3@2113.03,1737.31 2128.89,1721.46 2171.26,1721.46 2211.61,1761.81 2211.61,1769.68 2244.09,1802.17 2253.94,1802.17 2260.83,1809.05 2260.83,1820.87 2256.89,1824.8 2243.11,1824.8 2221.46,1846.46 2221.46,1879.92 2260.83,1919.29 2275.59,1919.29 2310.04,1884.84 2328.74,1884.84 2340.55,1896.65 2340.55,1945.87 2332.68,1953.74 2310.04,1953.74 2291.34,1935.04 v1(2291.34,1934.05)
  Bottom Layer w6: v1(2120.08,2509.84) 2125,2504.92 2125,2253.94 2156.5,2222.44 2193.9,2222.44 2207.68,2208.66 2207.68,1956.69 2221.46,1942.91 2282.48,1942.91 v1(2291.34,1934.05)
DDR-DQ2_0: U31.A2 U66.F2 | length 1323.2
  Top Layer w6: U31.A2@2144.69,1768.75 2144.69,1773.62 2191.93,1820.87 2191.93,1900.59 2275.59,1984.25 2275.59,2003.94 2410.43,2138.78 v1(2410.43,2587.6) v1@2409.45,2588.58
  Top Layer w12: U66.F2@2104.33,2684.06 v1@2120.08,2699.8
  Bottom Layer w6: v1@2122.05,2698.82 2140.75,2680.12 2189.96,2680.12 2204.72,2694.88 2348.43,2694.88 2411.42,2631.89 v1@2411.42,2590.55
  other v1: 2121.06,2698.82
DDR-DQ3_0: U31.A4 U66.F8 | length 1283.4
  Top Layer w6: v1(2089.57,2509.84) 2104.33,2495.08 U66.F8@2104.33,2492.13 ; U31.A4@2144.69,1705.86 2181.26,1705.86 2291.34,1815.94 2291.34,1867.13 2268.7,1889.76 2255.91,1889.76 v1(2241.14,1875)
  Bottom Layer w6: v1@2092.52,2506.89 2112.2,2487.2 2112.2,2242.13 2145.67,2208.66 2177.17,2208.66 2192.91,2192.91 2192.91,1929.13 2197.83,1924.21 2276.58,1924.21 2282.48,1918.31 2282.48,1909.45 2275.59,1902.56 2198.82,1902.56 2191.93,1895.67 2191.93,1849.41 2198.82,1842.52 2211.61,1842.52 2241.14,1872.05 v1(2241.14,1875)
DDR-DQ4_0: U31.D3 U66.H3 | length 1328.7
  Top Layer w6: U66.H3@2041.34,2652.56 2041.34,2613.19 v1(2056.1,2598.42) ; U31.D3@2049.73,1737.31 2065.38,1752.95 2155.51,1752.95 2205.71,1803.15 2205.71,1888.78 2313.98,1997.05 v1(2315.95,1997.05)
  Bottom Layer w6: v1(2056.1,2598.42) 2071.85,2582.68 2132.87,2582.68 2157.48,2558.07 2281.5,2558.07 2346.46,2493.11 2346.46,2228.35 2315.95,2197.83 2315.95,1998.03 v1@2317.91,1996.06
DDR-DQ5_0: U31.D1 U66.H8 | length 1283.6
  Top Layer w6: U66.H8@2041.34,2492.13 2042.32,2492.13 v1(2057.09,2477.36) ; U31.D1@2049.73,1800.2 2049.73,1822.37 2096.46,1869.09 v1(2096.46,1898.62)
  Bottom Layer w6: v1@2058.07,2479.33 2058.07,2470.47 2080.71,2447.83 2080.71,2219.49 2102.36,2197.83 2102.36,1984.25 2107.28,1979.33 2171.26,1979.33 2177.17,1973.42 2177.17,1961.61 2172.24,1956.69 2095.47,1956.69 2091.54,1952.76 2091.54,1941.93 2095.47,1937.99 2166.34,1937.99 2177.17,1927.16 2177.17,1844.49 2171.26,1838.58 2163.39,1838.58 2155.51,1846.46 2155.51,1909.45 2149.61,1915.35 2144.69,1915.35 2136.81,1907.48 2136.81,1863.19 2131.89,1858.27 2124.02,1858.27 2117.13,1865.16 2117.13,1911.42 2113.19,1915.35 2103.35,1915.35 2096.46,1908.46 v1(2096.46,1898.62)
DDR-DQ6_0: U31.C1 U66.G2 | length 1293.7
  Top Layer w6: U66.G2@2072.84,2684.05 v1(2089.57,2667.32) ; U31.C1@2081.38,1800.2 2081.38,1834.33 2122.05,1875 2122.05,1960.63 2305.12,2143.7 2305.12,2164.37 2389.76,2249.02 v1(2389.76,2617.13)
  Bottom Layer w6: v1(2089.57,2667.32) 2192.91,2667.32 2209.65,2650.59 2359.25,2650.59 v1@2393.7,2616.14
DDR-DQ7_0: U31.E1 U66.H7 | length 1330.2
  Top Layer w6: U31.E1@2018.08,1800.2 2018.08,1831.07 2061.02,1874.02 2061.02,1934.05 2065.95,1938.98 2081.69,1938.98 2086.61,1943.9 2086.61,1953.74 2078.74,1961.61 2078.74,1967.52 2115.16,2003.94 v1(2120.08,2003.94) ; U66.H7@2041.34,2524.61 2042.32,2524.61 v1(2057.09,2509.84)
  Bottom Layer w6: v1(2057.09,2509.84) 2073.09,2493.84 2073.09,2471.21 2082.94,2461.36 2083.91,2461.36 2096.46,2448.82 2096.46,2233.27 2136.81,2192.91 2169.29,2192.91 2177.17,2185.04 2177.17,2175.2 2172.24,2170.28 2124.02,2170.28 2117.13,2163.39 2117.13,2153.54 2122.05,2148.62 2171.26,2148.62 2177.17,2142.72 2177.17,2134.84 2171.26,2128.94 2124.02,2128.94 2117.13,2122.05 2117.13,2114.17 2125,2106.3 2170.28,2106.3 2176.18,2100.39 2176.18,2092.52 2168.31,2084.65 2123.03,2084.65 2118.11,2079.72 2118.11,2068.9 2122.05,2064.96 2171.26,2064.96 2176.18,2060.04 2176.18,2048.23 2171.26,2043.31 2122.05,2043.31 2117.13,2038.39 2117.13,2029.53 2124.02,2022.64 2170.28,2022.64 2172.24,2020.67 2172.24,2007.87 2166.34,2001.97 2122.05,2001.97 v1(2120.08,2003.94)
DDR-DQ8_0: U31.E2 U66.D7 | length 1288.5
  Top Layer w6: U31.E2@2018.08,1768.75 2016.68,1768.75 2001.97,1783.46 2001.97,1835.63 2046.26,1879.92 2046.26,1959.65 2122.05,2035.43 2151.58,2035.43 2250,2133.86 v1(2250,2134.84) ; U66.D7@2167.32,2524.61 2167.32,2556.1 2175.2,2563.98 2250.98,2563.98 v1(2280.51,2534.45)
  Bottom Layer w6: v1(2250,2134.84) 2252.95,2131.89 2276.58,2131.89 2285.43,2140.75 2285.43,2151.57 2278.54,2158.46 2248.03,2158.46 2241.14,2165.35 2241.14,2175.2 2249.02,2183.07 2277.56,2183.07 2282.48,2187.99 2282.48,2195.87 2276.57,2201.77 2246.06,2201.77 2241.14,2206.69 2241.14,2215.55 2248.03,2222.44 2316.93,2222.44 2331.69,2237.2 2331.69,2487.2 2286.42,2532.48 v1@2285.43,2532.48
DDR-DQ9_0: U31.E3 U66.C3 | length 1288.3
  Top Layer w6: U31.E3@2018.08,1737.31 2033.46,1752.69 2033.46,1825.79 2075.79,1868.11 2075.79,1905.51 2103.35,1933.07 2103.35,1961.61 2290.35,2148.62 2290.35,2179.13 2375.98,2264.76 2375.98,2280.51 2371.06,2285.43 2357.28,2285.43 2350.39,2292.32 2350.39,2301.18 2356.3,2307.09 2370.08,2307.09 2375.98,2312.99 2375.98,2322.83 2370.08,2328.74 2355.32,2328.74 2350.39,2333.66 2350.39,2342.52 2356.3,2348.42 2369.09,2348.42 2375,2354.33 2375,2603.35 v1@2350.39,2627.95 ; U66.C3@2198.82,2652.56 2198.82,2650.59 v1@2214.57,2634.84
  Bottom Layer w6: v1@2214.57,2634.84 2345.47,2634.84 v1(2352.36,2627.95)
  other v1: 2214.57,2633.86
DDR-DQ10_0: U31.G3 U66.C8 | length 1305.6
  Top Layer w6: U31.G3@1954.78,1737.31 1969.44,1751.97 v1(1970.47,1751.97) ; v1@1982.28,1920.28 v1(1981.3,1920.28) 1981.3,2064.96 2000.98,2084.65 2010.83,2084.65 2023.62,2071.85 2033.46,2071.85 2039.37,2077.76 2039.37,2086.61 2025.59,2100.39 2025.59,2108.27 2032.48,2115.16 2040.35,2115.16 2054.13,2101.38 2063.98,2101.38 2069.88,2107.28 2069.88,2116.14 2054.13,2131.89 2054.13,2136.81 2181.1,2263.78 v1(2186.02,2263.78) ; U66.C8@2198.82,2492.13 2199.8,2492.13 v1(2214.57,2477.36)
  Bottom Layer w6: v1(1970.47,1751.97) 1986.22,1767.72 1986.22,1913.39 v1@1983.27,1916.34 ; v1@2182.09,2263.78 2170.28,2263.78 2157.48,2276.57 2157.48,2320.87 2164.37,2327.76 2173.23,2327.76 2177.17,2323.82 2177.17,2285.43 2179.13,2283.46 2194.88,2283.46 2196.85,2285.43 2196.85,2302.17 2202.76,2308.07 2212.6,2308.07 2217.52,2303.15 2217.52,2252.95 2222.44,2248.03 2232.28,2248.03 2236.22,2251.97 2236.22,2297.24 2247.05,2308.07 2267.72,2308.07 2276.58,2316.93 2276.58,2350.39 2270.67,2356.3 2261.81,2356.3 2255.91,2362.2 2255.91,2408.46 2229.33,2435.04 2229.33,2463.58 2215.55,2477.36 v1(2214.57,2477.36)
DDR-DQ11_0: U31.H3 U66.C2 | length 1290.7
  Top Layer w6: U31.H3@1923.13,1737.31 1923.33,1737.31 v1@1937.99,1751.97 ; v1@1939.96,1883.86 v1(1940.95,1884.84) 1961.61,1905.51 1961.61,2070.87 2199.8,2309.05 2240.16,2309.05 2339.57,2408.46 2339.57,2577.76 2319.88,2597.44 2319.88,2687.99 2309.06,2698.82 2213.58,2698.82 U66.C2@2198.82,2684.05
  Bottom Layer w6: v1@1937.01,1750 v1(1938.98,1751.97) 1938.98,1814.97 1938.72,1815.22 1938.72,1882.62 v1(1940.95,1884.84)
DDR-DQ12_0: U31.J3 U66.A7 | length 1286.7
  Top Layer w6: U31.J3@1891.47,1737.31 1892.82,1737.31 v1(1907.48,1751.97) ; v1(1895.67,1938.98) 1895.67,2104.33 2025.59,2234.25 2025.59,2422.24 2031.5,2428.15 2041.34,2428.15 2046.26,2423.23 2046.26,2377.95 2049.21,2375 2061.02,2375 2065.95,2379.92 2065.95,2424.21 2071.85,2430.12 2077.76,2430.12 2084.65,2423.23 2084.65,2391.73 2089.57,2386.81 2099.41,2386.81 2105.32,2392.72 2105.32,2422.24 2112.2,2429.13 2276.58,2429.13 2295.28,2447.83 2295.28,2492.13 2262.8,2524.61 U66.A7@2261.81,2524.61
  Bottom Layer w6: v1@1895.67,1935.04 1895.67,1822.83 1907.48,1811.02 v1(1907.48,1751.97)
DDR-DQ13_0: U31.H2 U66.A2 | length 1285
  Top Layer w6: U31.H2@1923.13,1768.75 1907.48,1784.4 1907.48,1905.51 1930.12,1928.15 1930.12,2088.58 2056.1,2214.57 2056.1,2299.21 2156.5,2399.61 2297.24,2399.61 2324.8,2427.17 2324.8,2554.13 2280.51,2598.42 2280.51,2612.2 2285.43,2617.13 2298.23,2617.13 2305.12,2624.02 2305.12,2634.84 2301.18,2638.78 2286.42,2638.78 2280.51,2644.68 2280.51,2653.54 2287.4,2660.43 2301.18,2660.43 2305.12,2664.37 2305.12,2675.2 2297.24,2683.07 U66.A2@2264.76,2683.07